# Altium PCB PCB封装.PcbDoc
Units mil, origin at the board's own origin, x right, y up, seen from the top; angles counter-clockwise.
Board outline 4400 x 3100 mil, 2 copper layers (Top Layer, Bottom Layer); 101 components, 123 nets, 502 pads, 7 vias.
Unrouted connection lines stored in the file: 33.
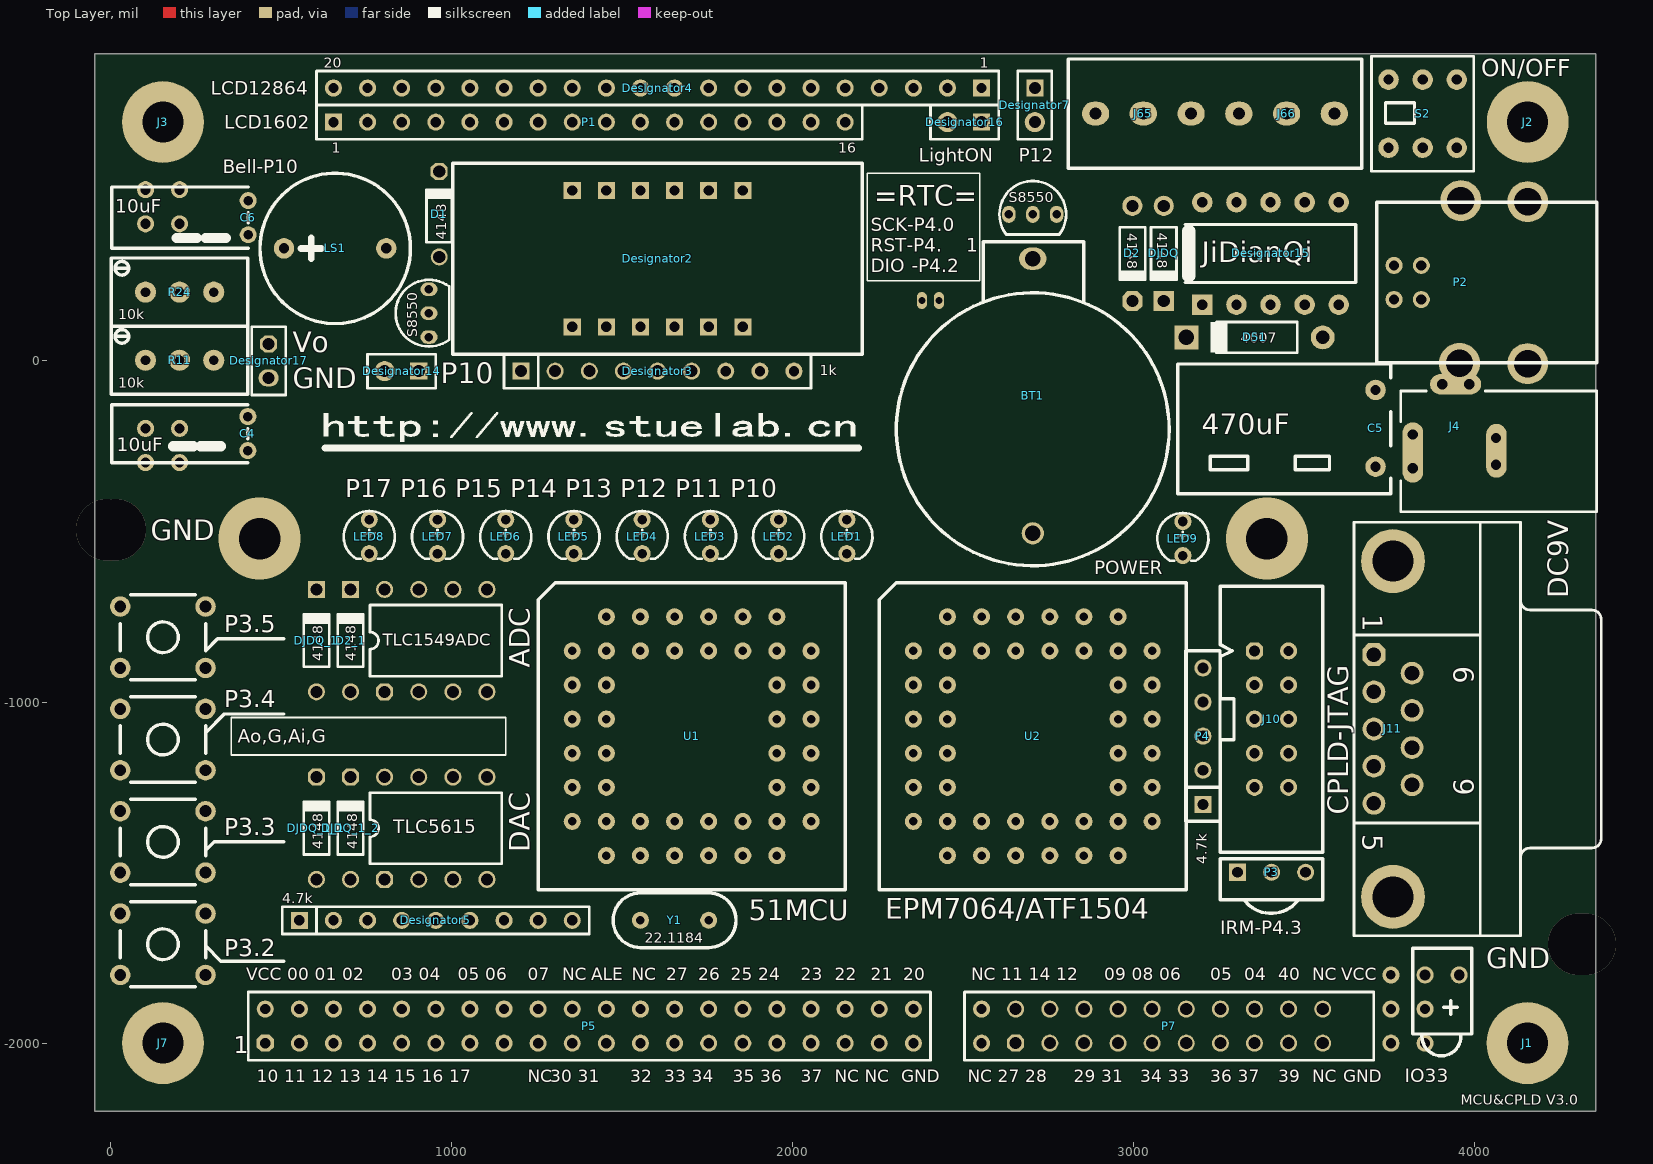
[diagram p0: Top Layer view]
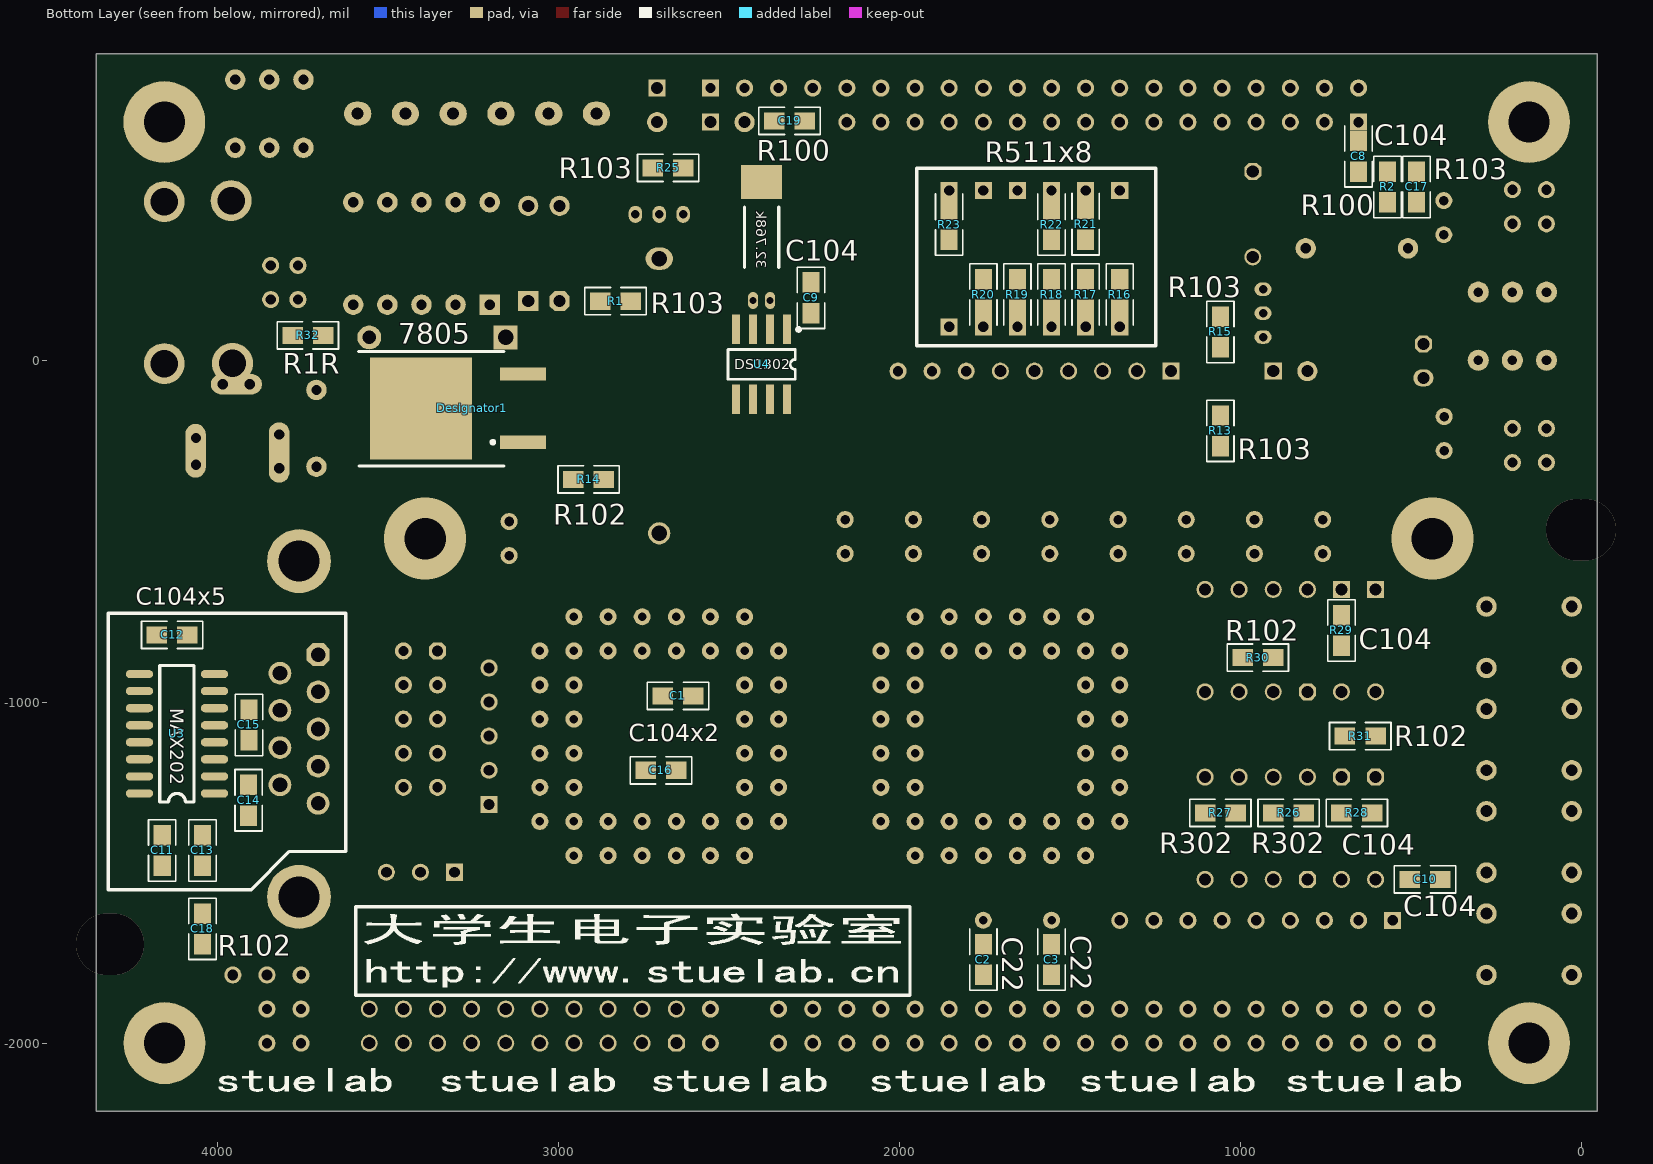
[diagram p1: Bottom Layer view, seen from below]

## Layer stack, top to bottom
Top Layer: signal copper 1.4
Dielectric: dielectric 12.6, FR-4, Dk 4.8
Bottom Layer: signal copper 1.4

## Board outline
-45,900 -45,-2200 4355,-2200 4355,900

## Design rules (kind name [scope] priority, off if disabled: settings)
Clearance [All] p1: gap=15
ComponentClearance [All] p1: gap=10 collisioncheckmode=3 verticalgap=10
FanoutControl Fanout_LCC [All] p1 off: bgadir=Out bgaviamode=Centered fanoutstyle=Auto fanoutdirection=Alternating viagrid=1 // Protel DXP Scope 1 Expression Was: IsLCC   Fanout_LCC (Default Rule)
FanoutControl Fanout_BGA [All] p2 off: bgadir=Out bgaviamode=Centered fanoutstyle=Auto fanoutdirection=Alternating viagrid=1 // Protel DXP Scope 1 Expression Was: IsBGA   Fanout_BGA (Default Rule)
FanoutControl Fanout_SOIC [All] p3 off: bgadir=Out bgaviamode=Centered fanoutstyle=Auto fanoutdirection=Alternating viagrid=1 // Protel DXP Scope 1 Expression Was: IsSOIC   Fanout_SOIC (Default Rule)
FanoutControl Fanout_Default [All] p4: bgadir=Out bgaviamode=Centered fanoutstyle=Auto fanoutdirection=Alternating viagrid=1 // Fanout_Default (Default Rule)
FanoutControl Fanout_Small [All] p5 off: bgadir=Out bgaviamode=Centered fanoutstyle=Auto fanoutdirection=Alternating viagrid=1 // Protel DXP Scope 1 Expression Was: (CompPinCount < 5)   Fanout_Small (Default Rule)
PlaneClearance [All] p1: clearance=50
PlaneConnect [All] p1: planeconnectstyle=Relief reliefexpansion=30 reliefentries=4 reliefconductorwidth=10 reliefairgap=30
PolygonConnect [All] p1: connectstyle=Relief reliefconductorwidth=15 reliefentries=4 polygonreliefangle="90 Angle"
RoutingVias [All] p1: holewidth=20 width=30 viastyle="Through Hole" minholewidth=20 minwidth=30 maxholewidth=20 maxwidth=30
SolderMaskExpansion [All] p1: expansion=4
TestPointUsage [All] p1: valid=0 allowmultiple=FALSE
Testpoint [All] p1: side=15 testpointundercomponent=TRUE minsize=40 maxsize=100 preferedsize=60 minholesize=0 maxholesize=40 preferedholesize=32 testpointgrid=1 style=1023 order=0-112345678
Width [InNet('JDQOUT1')] p1: maxlimit=30 minlimit=10 preferedwidth=30
Width Width_1 [InNet('JDQOUT2')] p2: maxlimit=30 minlimit=10 preferedwidth=30
Width Width_2 [InNet('JDQOUT3')] p3: maxlimit=30 minlimit=10 preferedwidth=30
Width WidthVCC [InNet('VCC')] p4: maxlimit=80 minlimit=10 preferedwidth=30 bottomlayer_prefwidth=40 minimp=50.000000 maximp=50.000000 favimp=50.000000
Width WidthVCCIN [InNet('VCCIN')] p5: maxlimit=80 minlimit=10 preferedwidth=50 toplayer_prefwidth=60 minimp=50.000000 maximp=50.000000 favimp=50.000000
Width WidthVCC9 [InNet('VCC9')] p6: maxlimit=80 minlimit=10 preferedwidth=40
Width WidthGND [InNet('GND')] p7: maxlimit=100 minlimit=10 preferedwidth=50 toplayer_prefwidth=20 bottomlayer_prefwidth=30 minimp=50.000000 maximp=50.000000 favimp=50.000000
Width WidthALL [All] p8: maxlimit=20 minlimit=10 preferedwidth=10
11 further rules are at their usual default settings.

## Classes and differential pairs
component class POWER: C1 C5 C6 C7 C8 C9 C10 C16 D3 J4 LED9 P2 R14 S1 U5
component class RS232: C6 C8 C9 C11 C13 J11 U3 XS1
component class MCU-CPLD: 32.768k BT1 C2 C3 C4 D1 D2 ET0 INT1 J1 J2 J3 J5 J6 J7 J8 J9 J10 LS1 P3 P3.4 P3.5 P4 P5 P6 P7 R1 R2 R13 R15 S8550 U1 U2 U4 Y1
component class DISPLED: DISP1 DISP2 LED1 LED2 LED3 LED4 LED5 LED6 LED7 LED8 P1 R3 R4 R5 R6 R7 R8 R9 R10 R11 R12

## Components (designator, comment, footprint, x,y, rotation, side; value= is the part's Value field where it differs from the comment)
32.768k "XTAL" BCY-W2/D3.1 2355,175 r90 bottom locked
BT1 "Battery" LI1220B 2705,299.72 r0 top locked
C1 "104" 0805 2650,-982 r180 bottom
C2 "C22" 0805 1755,-1755 r90 bottom
C3 "C22" 0805 1555,-1755 r90 bottom
C4 "10uF" CAP1.0D 404,-163 r0 top locked
C5 "470uF" CAP2.0D 3730,-99 r270 top locked
C6 "10uF" CAP1.0D 405,470 r0 top locked
C8 "C104" 0805 655,599.72 r90 bottom
C9 "C104" 0805 2260,185 r90 bottom
C10 "C104" 0805 460,-1520 r180 bottom
C11 "C104" 0805 4162,-1435 r90 bottom
C12 "C104" 0805 4133,-803 r180 bottom
C13 "C104x5" 0805 4044,-1435 r90 bottom
C14 "C104" 0805 3908.8,-1287.94 r90 bottom
C15 "C104" 0805 3907.72,-1067 r90 bottom
C16 "C104x2" 0805 2700,-1200 r0 bottom
C17 "R103" 0805 485,510 r270 bottom locked
C18 "R102" 0805 4044,-1665 r90 bottom locked
C19 "R100" 0805 2323,704 r180 bottom
D1 "4148" DIO7.1-3.9x1.9#1 965,425 r90 top locked
D2 "4148" DIO7.1-3.9x1.9#2 2997,315 r270 top
D2_1 "4148" DIO7.1-3.9x1.9#3 705,-820 r90 top locked
D51 "4007" DIO7.1-3.9x1.9#4 3295,69 r180 top locked
Designator1 "7805" TO-263 3309.91,-138.28 r90 bottom locked
Designator2 "Comment" DISP4 1355,100 r0 top locked
Designator3 "1k" HDR1X9#1 1205,-30 r0 top locked
Designator4 "Comment" HDR1X20 2555,800 r180 top locked
Designator5 "4.7k" HDR1X9#2 555,-1640 r0 top locked
Designator7 "Comment" HDR1X2#1 2711,800 r270 top
Designator14 "Comment" HDR1X2#1 905,-30 r180 top locked
Designator15 "JiDianQi" DIP10 3202,165 r90 top locked
Designator16 "Comment" HDR1X2#1 2555,700 r180 top
Designator17 "Comment" HDR1X2#2 465,50 r270 top locked
DJDQ "4148" DIO7.1-3.9x1.9#5 3089,315 r270 top
DJDQ_1 "4148" DIO7.1-3.9x1.9#3 605,-820 r90 top locked
DJDQ_1_1 "4148" DIO7.1-3.9x1.9#6 605,-1370 r90 top locked
DJDQ_1_2 "4148" DIO7.1-3.9x1.9#6 705,-1370 r90 top locked
J1 "Socket" HANPAN2 4155,-2000 r0 top
J2 "Socket" HANPAN2 4155.91,700 r0 top
J3 "Socket" HANPAN2 155,700 r0 top
J4 "PWR2.5" KLD-0202 3819,-216 r180 top locked
J7 "Socket" HANPAN2 155,-2000 r0 top locked
J10 "CPLD-JTAG" CON10 3355,-850 r270 top locked
J11 "D Connector 9" DSUB1.385-2H9 4135,-1079 r270 top locked
J65 "CON3" CON3BIG 2889,725 r0 top locked
J66 "CON3" CON3BIG 3309,725 r0 top locked
LED1 "P10" LED0.3 2160,-465 r270 top locked
LED2 "P10" LED0.3 1960,-465 r270 top locked
LED3 "P10" LED0.3 1760,-465 r270 top locked
LED4 "P10" LED0.3 1560,-465 r270 top locked
LED5 "P10" LED0.3 1360,-465 r270 top locked
LED6 "P10" LED0.3 1160,-465 r270 top locked
LED7 "P10" LED0.3 960,-465 r270 top locked
LED8 "P10" LED0.3 760,-465 r270 top locked
LED9 "POWER" LED0.3 3145,-470.75 r270 top locked
LS1 "Bell-P10" BELL 810,330 r0 top locked
P1 "Header 16" LCD1602B 655,700 r0 top locked
P2 "USBCON" USBCON 3960,230 r180 top locked
P3 "IRM-P4.3" HWJS 3305,-1499 r0 top locked
P3.2 "SW-PB" SW6X6 155,-1710 r0 top locked
P3.3 "SW-PB" SW6X6 155,-1410 r0 top locked
P3.4 "SW-PB" SW6X6 155,-1110 r0 top locked
P3.5 "SW-PB" SW6X6 155,-810 r0 top locked
P4 "4.7k" SIP5 3204,-1300 r90 top
P5 "Header 20X2" HDR2X20 455,-2000 r0 top locked
P7 "Header 9X2" HDR2X9 2655,-2000 r0 top locked
R1 "R103" 0805 2833,175 r0 bottom
R2 "R100" 0805 570,510 r90 bottom locked
R11 "10k" VRX 104,2 r0 top locked
R13 "R103" CR2012-0805 1060,-205 r270 bottom locked
R14 "R102" CR2012-0805 2912,-347 r180 bottom
R15 "R103" 0805 1060,85 r90 bottom locked
R16 "R511x8" CR2012-0805 1355,194.72 r270 bottom locked
R17 "511" CR2012-0805 1455,194.72 r270 bottom locked
R18 "511" CR2012-0805 1555,194.72 r270 bottom locked
R19 "511" CR2012-0805 1655,194.72 r270 bottom locked
R20 "511" CR2012-0805 1755,194.72 r270 bottom locked
R21 "511" CR2012-0805 1455,400.72 r270 bottom locked
R22 "511" CR2012-0805 1555,399.72 r270 bottom locked
R23 "511" CR2012-0805 1855,399.72 r270 bottom locked
R24 "10k" VRX 104,201.72 r0 top locked
R25 "R103" 0805 2679,566 r180 bottom locked
R26 "R302" CR2012-0805 860,-1325 r0 bottom locked
R27 "R302" CR2012-0805 1060,-1325 r0 bottom locked
R28 "C104" CR2012-0805 660,-1325 r180 bottom locked
R29 "C104" CR2012-0805 705,-790 r270 bottom
R30 "R102" CR2012-0805 950,-870 r0 bottom
R31 "R102" CR2012-0805 650,-1100 r0 bottom
R32 "R1R" CR2012-0805 3735,75 r180 bottom
S2 "SW-DPDT" DPDT-6 3848,724.72 r90 top locked
S8550 "2N3906" BCY-W3/E4 935,140 r0 top locked
S8550 "2N3906" BCY-W3/E4 2705,429.72 r270 top locked
TLC1549ADC "Comment" PDIP8 955,-820 r0 top locked
TLC5615 "Comment" PDIP8 955,-1370 r0 top locked
U1 "STC89C5X" PGA44 1355,-750 r0 top locked
U2 "EPM7064SLC44-10" PGA44 2355,-750 r0 top locked
U3 "MAX202" SO-16 4008.8,-1267.94 r0 bottom locked
U4 "DS1302" SO-8 2405,-10 r0 bottom locked
Y1 "22.1184" CY 1755,-1640 r180 top locked
? "Comment" LED-1 3905,-1800 r270 top locked

## Footprints (in the part's own frame and the unit in brackets; to place one, negate y for a bottom-side part, rotate by r counter-clockwise, add the part's x,y. Pads: shape width x height; smd on the part's side, far side on the other; paste and mask are expansions set on the pad)
0805 [mil]
  rect 60x50 smd: 1(-45,0) 2(45,0)
  silkscreen extent -90,-40 90,40
BCY-W2/D3.1 [mil]
  rect 100x120 smd: 0(350,50)
  oval 50x30 hole 20: 1(2,75) 2(2,25)
  silkscreen extent 100,0 275,100
BCY-W3/E4 [mil]
  oval 50x39.37 hole 25: 1(0,-70) 2(0,0)
  oval 50x40 hole 25: 3(0,70)
  silkscreen extent -98,-98 59,98
BELL [mil]
  round 60 hole 30: 1(0,0) 2(-300,0)
  silkscreen extent -370,-220 70,220
CAP1.0D [mil]
  round 50 hole 28: 1(0,0) 2(0,-100)
  silkscreen extent -399,-135 0,35
CAP2.0D [mil]
  round 60 hole 30: 1(-14,-20) 2(211,-20)
  silkscreen extent -90,-600 290,25
CON3BIG [mil]
  oval 80x70 hole 35: 1(0,0) 2(140,0) 3(280,0)
  silkscreen extent -80,-160 360,160
CON10 [mil]
  oct 50x50 hole 32: 1(0,0)
  round 50 hole 30: 2(0,100) 3(100,0) 4(100,100) 5(200,0) 6(200,100) 7(300,0) 8(300,100) 9(400,0) 10(400,100)
  silkscreen extent -190,-100 590,200
CR2012-0805 [mil]
  rect 60x50 smd: 1(-45,0) 2(45,0)
  silkscreen extent -90,-40 90,40
CY [mil]
  round 50 hole 25: 1(0,-0.28) 2(200,-0.28)
  silkscreen extent -80,-80 280,80
DIO7.1-3.9x1.9#1 [mil]
  round 50 hole 35.43: 1(-120,0)
  oct 50x50 hole 35.43: 2(130,0)
  silkscreen extent -77,-37 81,37
DIO7.1-3.9x1.9#2 [mil]
  round 59.06 hole 35.43: 1(-139.76,0)
  oct 59.05x59.05 hole 35.43: 2(139.76,0)
  silkscreen extent -77,-37 81,37
DIO7.1-3.9x1.9#3 [mil]
  round 50 hole 35.43: 1(-150,0)
  rect 50x50 hole 35.43: 2(150,0)
  silkscreen extent -77,-37 81,37
DIO7.1-3.9x1.9#4 [mil]
  round 70 hole 40: 1(-260,0)
  rect 70x70 hole 45: 2(139.76,0)
  silkscreen extent -185,-45 69,45
DIO7.1-3.9x1.9#5 [mil]
  round 59.05 hole 35.43: 1(-139.76,0)
  rect 59.05x59.05 hole 35.43: 2(139.76,0)
  silkscreen extent -77,-37 81,37
DIO7.1-3.9x1.9#6 [mil]
  round 50 hole 35.43: 1(-150,0)
  oct 50x50 hole 35.43: 2(150,0)
  silkscreen extent -77,-37 81,37
DIP10 [mil]
  rect 60x60 hole 30: 1(0,0)
  round 60 hole 30: 2(0,-100) 3(0,-200) 4(0,-300) 5(0,-400) 6(300,-400) 7(300,-300) 8(300,-200) 9(300,-100) 10(300,0)
  silkscreen extent 65,-450 235,50
DISP4 [mil]
  rect 50x50 hole 30: 1(0,0) 2(100,0) 3(200,0) 4(300,0) 5(400,0) 6(500,0) 7(500,400) 8(400,400) 9(300,400) 10(200,400) 11(100,400) 12(0,400)
  silkscreen extent -350,-80 850,480
DPDT-6 [mil]
  round 60 hole 30: 1(-100,100) 2(-100,0) 3(-100,-100) 4(100,-100) 5(100,0) 6(100,100)
  silkscreen extent -169,-150 169,150
DSUB1.385-2H9 [mm]
  oct 1.69x1.69 hole 1.09: 1(-5.54,-10.92)
  round 1.69 hole 1.09: 2(-2.77,-10.92) 3(0,-10.92) 4(2.77,-10.92) 5(5.54,-10.92) 6(-4.155,-8.08) 7(-1.385,-8.08) 8(1.385,-8.08) 9(4.155,-8.08)
  round 4.76 hole 3.048: 10(-12.495,-9.5) 11(12.495,-9.5)
  silkscreen extent -15.4,-12.4 15.4,6
HANPAN2 [mil]
  round 240 hole 120: 1(0,0)
HDR1X2#1 [mm]
  rect 1.27x1.27 hole 0.9: 1(0,0)
  round 1.5 hole 0.9: 2(2.54,0)
  silkscreen extent -1.27,-1.27 3.81,1.27
HDR1X2#2 [mm]
  oct 1.27x1.27 hole 0.9: 1(0,0)
  oval 1.27x1.5 hole 0.9: 2(2.54,0)
  silkscreen extent -1.27,-1.27 3.81,1.27
HDR1X9#1 [mm]
  rect 1.27x1.27 hole 0.9: 1(0,0)
  round 1.27 hole 0.9: 2(2.54,0) 3(5.08,0) 4(7.62,0) 5(10.16,0) 6(12.7,0)
  round 1.27 hole 0.762: 7(15.24,0) 8(17.78,0) 9(20.32,0)
  silkscreen extent -1.27,-1.27 21.59,1.27
HDR1X9#2 [mm]
  rect 1.27x1.27 hole 0.762: 1(0,0)
  round 1.27 hole 0.762: 2(2.54,0) 3(5.08,0) 4(7.62,0) 5(10.16,0) 6(12.7,0) 7(15.24,0) 8(17.78,0) 9(20.32,0)
  silkscreen extent -1.27,-1.02 21.59,1.02
HDR1X20 [mil]
  rect 50x50 hole 30: 1(0,0)
  round 50 hole 30: 2(100,0) 3(200,0) 4(300,0) 5(400,0) 6(500,0) 7(600,0) 8(700,0) 9(800,0) 10(900,0) 11(1000,0) 12(1100,0) 13(1200,0) 14(1300,0) 15(1400,0) 16(1500,0) 17(1600,0) 18(1700,0) 19(1800,0) 20(1900,0)
  silkscreen extent -50,-50 1950,50
HDR2X9 [mm]
  oct 1.27x1.27 hole 0.9: 1(0,0)
  round 1.27 hole 0.9: 2(0,2.54) 3(2.54,0) 4(2.54,2.54) 5(5.08,0) 6(5.08,2.54) 7(7.62,0) 8(7.62,2.54) 9(10.16,0) 10(10.16,2.54) 11(12.7,0) 12(12.7,2.54) 13(15.24,0) 14(15.24,2.54) 15(17.78,0) 16(17.78,2.54) 17(20.32,0) 18(20.32,2.54) 19(22.86,0) 20(22.86,2.54)
  silkscreen extent -3.81,-1.27 26.67,3.81
HDR2X20 [mil]
  oct 50x50 hole 30: 1(0,0)
  round 50 hole 30: 2(0,100) 3(100,0) 4(100,100) 5(200,0) 6(200,100) 7(300,0) 8(300,100) 9(400,0) 10(400,100) 11(500,0) 12(500,100) 13(600,0) 14(600,100) 15(700,0) 16(700,100) 17(800,0) 18(800,100) 19(900,0) 20(900,100) 21(1000,0) 22(1000,100) 23(1100,0) 24(1100,100) 25(1200,0) 26(1200,100) 27(1300,0) 28(1300,100) 29(1400,0) 30(1400,100) 31(1500,0) 32(1500,100) 33(1600,0) 34(1600,100) 35(1700,0) 36(1700,100) 37(1800,0) 38(1800,100) 39(1900,0) 40(1900,100)
  silkscreen extent -50,-50 1950,150
HWJS [mil]
  rect 50x50 hole 32: 1(0,0)
  round 50 hole 32: 2(100,0) 3(200,0)
  silkscreen extent -50,-121 250,40
KLD-0202 [mm]
  oval 1.524x4.5 all layers, no hole: 1(-0.009,1.33)
  round 1.5 hole 0.762: 1A(0,0) 1B(0,2.5) 2A(-6.2,0.25) 2B(-6.2,2.25)
  oval 1.524x4 all layers, no hole: 2(-6.232,1.203)
  oval 3.81x1.524 all layers, no hole: 3(-3.184,-3.75)
  round 1.524 hole 0.762: 3A(-4.2,-3.75) 3B(-2.2,-3.75)
  silkscreen extent -13.7,-3.25 0.9,5.75
LCD1602B [mil]
  rect 50x50 hole 30: 1(0,0)
  round 50 hole 30: 2(100,0) 3(200,0) 4(300,0) 5(400,0) 6(500,0) 7(600,0) 8(700,0) 9(800,0) 10(900,0) 11(1000,0) 12(1100,0) 13(1200,0) 14(1300,0) 15(1400,0) 16(1500,0)
  silkscreen extent -50,-50 1550,50
LED0.3 [mil]
  round 50 hole 28: 1(0,0) 2(100,0)
  silkscreen extent -25,-75 115,75
LED-1 [mm] "Typical RED GaAs LED; 2 Leads"
  round 1.27 hole 0.8: 1(0,1.27) 2(0,-1.27)
  silkscreen extent -2,-2.2 6.02,2.2
LI1220B [mil]
  oval 80x65 hole 45: 1(0,0)
  round 65 hole 45: 2(0,-805)
  silkscreen extent -400,-900 400,50
PDIP8 [mm] "8-Pin Plastic Dual In-Line Package (PDIP)"
  oct 1.27x1.27 hole 0.9: 1(-3.81,-3.81)
  round 1.27 hole 0.9: 2(-1.27,-3.81) 3(1.27,-3.81) 4(3.81,-3.81) 5(3.81,3.81) 6(1.27,3.81) 7(-1.27,3.81) 8(-3.81,3.81)
  silkscreen extent -4.9,-2.65 4.9,2.65
PGA44 [mil]
  round 50 hole 25: 1(400,-100) 2(300,0) 3(300,-100) 4(200,0) 5(200,-100) 6(100,0) 7(0,-100) 8(100,-100) 9(0,-200) 10(100,-200) 11(0,-300) 12(100,-300) 13(0,-400) 14(100,-400) 15(0,-500) 16(100,-500) 17(0,-600) 18(100,-700) 19(100,-600) 20(200,-700) 21(200,-600) 22(300,-700) 23(300,-600) 24(400,-700) 25(400,-600) 26(500,-700) 27(500,-600) 28(600,-700) 29(700,-600) 30(600,-600) 31(700,-500) 32(600,-500) 33(700,-400) 34(600,-400) 35(700,-300) 36(600,-300) 37(700,-200) 38(600,-200) 39(700,-100) 40(600,0) 41(600,-100) 42(500,0) 43(500,-100) 44(400,0)
  silkscreen extent -100,-800 800,100
SIP5 [mil]
  rect 50x50 hole 32: 1(0,0)
  round 50 hole 32: 2(100,0) 3(200,0) 4(300,0) 5(400,0)
  silkscreen extent -50,-50 450,50
SO-8 [mm]
  rect 0.6x2.2 smd: 1(-1.905,-2.6) 2(-0.635,-2.6) 3(0.635,-2.6) 4(1.905,-2.6) 5(1.905,2.6) 6(0.635,2.6) 7(-0.635,2.6) 8(-1.905,2.6)
  silkscreen extent -2.88,-2.72 2.5,1.1
SO-16 [mil]
  oval 80x24 smd: 1(0,0) 2(0,-50) 3(0,-100) 4(0,-150) 5(0,-200) 6(0,-250) 7(0,-300) 8(0,-350) 9(220,-350) 10(220,-300) 11(220,-250) 12(220,-200) 13(220,-150) 14(220,-100) 15(220,-50) 16(220,0)
  silkscreen extent 60,-375 160,25
SW6X6 [mil]
  round 60 hole 35: 1(-125,90) 2(-125,-90) 3(125,90) 4(125,-90)
  silkscreen extent -125,-125 125,125
TO-263 [mm]
  rect 1x3.4 smd: 1(-2.54,-5.225) 3(2.54,-5.225)
  rect 7.62x7.62 smd: 4(-0.025,2.37)
  silkscreen extent -4.32,-3.81 4.22,7.03
USBCON [mil]
  round 50 hole 30: 1(196,-50) 2(196,50) 3(116,50) 4(116,-50)
  round 120 hole 80: 5(4,237) 6(0,-240) 7(-196,-237) 8(-196,238)
  silkscreen extent -399,-235 246,235
VRX [mil]
  round 62 hole 28: 1(0,0) 2(200,0) 3(100,0)
  silkscreen extent -100,-100 300,100

## Part data
?: library part LED1

## Free pads (board coordinates)
  round 50 hole 30: 0(2555,-1900) 0(3755,-1900) 1(2555,-2000) 1(3755,-2000) 2(3855,-1900) 3(3855,-2000) 6(104,502) 7(104,402) 8(204,502) 9(204,402) 10(104,-198) 11(104,-298) 12(204,-198) 13(204,-298)

## Via types
v1: diameter 180, hole 180, Top Layer to Bottom Layer, 4 vias
v2: diameter 240, hole 122.05, Top Layer to Bottom Layer, 2 vias
v3: diameter 50, hole 28, Top Layer to Bottom Layer, 1 vias

## Nets (pads, with @x,y where several pads share a name; then routed paths per layer and width w, separated by ;. In a path a pad name is that pad's centre, name@x,y a point inside that pad or via, vN(x,y) a via of type N, cw(c..) or ccw(c..) an arc to the next point about the centre after c; other vN are vias at no path point)
7SEG1: Designator2.6 P7.13 U2.36
7SEG2: Designator2.8 P7.15 U2.37
7SEG3: Designator2.9 P7.17 U2.39
7SEG4: Designator2.12 P7.18 U2.40
a: Designator2.11 R21.1
aa: P7.4 R21.2 U2.14
ALE: P5.22 U1.33 U2.43
ALin: D2_1.1 DJDQ_1_2.2 R30.1 TLC1549ADC.2
Alin0: R30.2
b: Designator2.7 R23.1
bb: P7.16 R23.2 U2.4
bellin: Designator14.2 R15.1
c: Designator2.4 R19.2
cc: P7.12 R19.1 U2.6
d: Designator2.2 R17.2
DAO: DJDQ_1.1 DJDQ_1_1.2 R31.1 TLC5615.7
DAO0: R31.2
DAREF: R26.2 R27.1 TLC5615.6
dd: P7.8 R17.1 U2.9
e: Designator2.1 R16.2
ee: P7.6 R16.1 U2.12
f: Designator2.10 R22.1
ff: P7.2 R22.2 U2.11
g: Designator2.5 R20.2
gg: P7.14 R20.1 U2.5
GND: 32.768k.0 BT1.2 C1.2 C2.1 C3.1 C5.2 C6.2 C8.2 C9.2 C10.2 C11.2 C12.1 C16.2 D51.1 Designator1.4 Designator4.1 Designator4.20 Designator17.2 DJDQ_1_1.1 DJDQ_1_2.1 J4.2 J4.2A J4.2B J4.3 J4.3A J4.3B J10.2 J10.10 J11.5 J11.10 J11.11 LED9.2 P1.1 P1.16 P2.4 P2.5 P2.6 P2.7 P2.8 P3.2 P3.2.1 P3.2.3 P3.3.1 P3.3.3 P3.4.1 P3.4.3 P3.5.1 P3.5.3 P5.39 R11.1 R13.2 R24.1 R27.2 R28.2 R29.2 S8550.3 TLC1549ADC.3 TLC1549ADC.4 TLC5615.5 U1.22 U2.10 U2.22 U2.30 U2.42 U3.11 U3.13 U3.15 U4.4
IO01: P7.1 U2.27
IO02: P7.3 U2.28
IO03: P7.5 U2.29
IO04: P7.7 U2.31
IO05: P7.9 U2.34
IO06: ?.2 P7.11 U2.33
JDQC1: Designator7.1 R25.2
JDQCP: Designator15.10 DJDQ.1 S8550.1@2635,429.72
JDQCP1: R25.1 S8550.2@2705,429.72
JDQOUT1: Designator15.2 J65.1
JDQOUT2: Designator15.3 J65.2
JDQOUT3: Designator15.4 J65.3
JDQOUT21: Designator15.9 J66.1
JDQOUT22: Designator15.8 J66.2
JDQOUT23: Designator15.7 J66.3
LCDEN: Designator4.6 U2.41
LcdEn2: P1.6 U2.16
LCDRST: C6.1 C17.2 Designator4.17
LCDVEE: Designator4.18 R24.2
LCDVIN: Designator4.3 R24.3
LEDD0: Designator3.9 LED1.1
LEDD1: Designator3.8 LED2.1
LEDD2: Designator3.7 LED3.1
LEDD3: Designator3.6 LED4.1
LEDD4: Designator3.5 LED5.1
LEDD5: Designator3.4 LED6.1
LEDD6: Designator3.3 LED7.1
LEDD7: Designator3.2 LED8.1
ledf0: ?.1 C18.1
NetBT1_1: BT1.1 R1.1 U4.8
NetC12_2: C12.2 U3.6
NetC13_2: C13.2 U3.2
NetC14_1: C14.1 U3.1
NetC14_2: C14.2 U3.3
NetC15_1: C15.1 U3.4
NetC15_2: C15.2 U3.5
NetD1_1: D1.1 LS1.1 S8550.1@935,70
NetD1_2: D1.2 LS1.2 R2.1
NetD2_2: D2.2 R1.2
NetJ10_1: J10.1 P4.5 U2.32
NetJ10_3: J10.3 P4.4 U2.38
NetJ10_7: J10.5 P4.3 U2.13
NetJ10_9: J10.9 P4.2 U2.7
NetLED9_1: LED9.1 R14.1
NetP1_3: Designator17.1 P1.3 R11.3
NetQ1_2: R15.2 S8550.2@935,140
NetU4_2: 32.768k.2 U4.2
NetU4_3: 32.768k.1 U4.3
p: Designator2.3 R18.2
P00: Designator4.7 Designator5.2 P1.7 P5.4 U1.43 U2.17
P01: Designator4.8 Designator5.3 P1.8 P5.6 U1.42 U2.18
P02: Designator4.9 Designator5.4 P1.9 P5.8 U1.41 U2.19
P03: Designator4.10 Designator5.5 P1.10 P5.10 U1.40 U2.20
P04: Designator4.11 Designator5.6 P1.11 P5.12 U1.39 U2.21
P05: Designator4.12 Designator5.7 P1.12 P5.14 U1.38 U2.24
P06: Designator4.13 Designator5.8 P1.13 P5.16 U1.37 U2.25
P07: Designator4.14 Designator5.9 P1.14 P5.18 U1.36 U2.26
P10: Designator14.1 LED1.2 P5.1 U1.2
P11: LED2.2 P5.3 TLC5615.1 U1.3
P12: Designator7.2 LED3.2 P5.5 TLC5615.2 U1.4
P13: LED4.2 P5.7 TLC5615.4 U1.5
P14: LED5.2 P5.9 TLC5615.3 U1.6
P15: LED6.2 P5.11 TLC1549ADC.5 U1.7
P16: LED7.2 P5.13 TLC1549ADC.6 U1.8
P17: LED8.2 P5.15 TLC1549ADC.7 U1.9
P20: Designator4.4 P1.4 P5.40 U1.24
P21: Designator4.5 P1.5 P5.38 U1.25
P22: Designator4.15 P5.36 U1.26
P23: Designator4.16 P5.34 U1.27
P24: P5.32 U1.28
P25: P5.30 U1.29
P26: P5.28 U1.30
P27: P5.26 U1.31 U2.1
P30: P5.19 U1.11 U3.9
P31: P5.21 U1.13 U3.10
P32: P3.2.2 P3.2.4 P5.23 U1.14
P33: P3.3.2 P3.3.4 P5.25 U1.15
P34: P3.4.2 P3.4.4 P5.27 U1.16
P35: P3.5.2 P3.5.4 P5.29 U1.17
P36: P5.31 U1.18 U2.2
P37: P5.33 U1.19 U2.44
P40: U1.23 U4.7
P41: U1.34 U4.5
P42: U1.1 U4.6
P43: P3.1 U1.12
pp: P7.10 R18.1 U2.8
RSET: C4.2 R13.1 U1.10
RXD': J11.2 U3.7
TXD': J11.3 U3.8
VCC: C1.1 C4.1 C8.1 C9.1 C10.1 C11.1 C13.1 C16.1 C17.1 C18.2 D2.1 D2_1.2 Designator3.1 Designator4.2 Designator5.1 Designator15.1 Designator16.1 DJDQ.2 DJDQ_1.2 J10.4 P1.2 P3.3 P4.1 P5.2 R2.2 R11.2 R14.2 R26.1 R28.1 R29.1 S2.1 S2.3 S2.4 S2.6 TLC1549ADC.1 TLC1549ADC.8 TLC5615.8 U1.35 U1.44 U2.3 U2.15 U2.23 U2.35 U3.16 U4.1
VCC9: D51.2 Designator1.1 J4.1 J4.1A J4.1B
VCCIN: C5.1 Designator1.3 R32.1 S2.2 S2.5
VCCL: C19.2 Designator4.19 P1.15
VCCL0: C19.1 Designator16.2
VCCUSB: P2.1 R32.2
XTAL1: C2.2 U1.21 Y1.1
XTAL2: C3.2 U1.20 Y1.2
pads on no net: Designator15.5 Designator15.6 J1.1 J2.1 J3.1 J7.1 J10.6 J10.7 J10.8 J11.1 J11.4 J11.6 J11.7 J11.8 J11.9 P2.2 P2.3 P5.17 P5.20 P5.24 P5.35 P5.37 P7.19 P7.20 U1.32 U3.12 U3.14
copper on no net:
  other v1: 4305,-1710 4325,-1710 -10,-495 15,-495
  other v2: 438.46,-520.75 3391.22,-520.75
  other v3: 3755,-1800

## Silkscreen, mask and mechanical layers (free items; w line width, h text height)
Top Overlay:
  drawing of 1667 lines, arcs and shapes, not listed
  text "20" at 626,859.72 h30
  text "1" at 2550,860 h30
  text "ON/OFF" at 4020,835 h50
  text "LCD12864" at 295,780 h40
  text "LCD1602" at 335,680 h40
  text "1" at 650,610 h30
  text "16" at 2135,610 h30
  text "LightON" at 2371,584 h40
  text "P12" at 2664,584 h40
  text "Bell-P10" at 330,550 h40
  text "=RTC=" at 2240,455 h60
  text "SCK-P4.0" at 2230,380 h40
  text "RST-P4." at 2230,320 h40
  text "1" at 2510,320 h40
  text "DIO" at 2230,260 h40
  text "-P4.2" at 2350,260 h40
  text "Vo" at 535,25 h60
  text "P10" at 970,-65 h60
  text "GND" at 535,-80 h60
  text "P17 P16 P15 P14 P13 P12 P11 P10" at 690,-400 h53
  text "GND" at 120,-525 h60
  text "DC9V" at 4275,-695 h60 r90
  text "ADC" at 1230,-900 h60 r90
  text "Ao,G,Ai,G" at 375,-1120 h40
  text "DAC" at 1230,-1440 h60 r90
  text "EPM7064/ATF1504" at 2273,-1635.28 h60
  text "51MCU" at 1873,-1640.28 h60
  text "GND" at 4035,-1780 h60
  text "VCC" at 400,-1815 h36
  text "00 01 02" at 520,-1815 h36
  text "03 04" at 825,-1815 h36
  text "05 06" at 1020,-1815 h36
  text "07" at 1225,-1815 h36
  text "NC" at 1325,-1815 h36
  text "ALE" at 1410,-1815 h36
  text "NC" at 1530,-1815 h36
  text "27" at 1630,-1815 h36
  text "26" at 1725,-1815 h36
  text "25 24" at 1820,-1815 h36
  text "23" at 2025,-1815 h36
  text "22" at 2125,-1815 h36
  text "21" at 2230,-1815 h36
  text "20" at 2325,-1815 h36
  text "NC 11 14 12" at 2525,-1815 h36
  text "09 08 06" at 2915,-1815 h36
  text "05" at 3225,-1815 h36
  text "04" at 3325,-1815 h36
  text "40" at 3425,-1815 h36
  text "NC" at 3525,-1815 h36
  text "VCC" at 3610,-1815 h36
  text "10 11 12 13 14 15 16 17" at 430,-2115 h36
  text "NC" at 1225,-2115 h36
  text "30 31" at 1290,-2115 h36
  text "32" at 1525,-2115 h36
  text "33 34" at 1625,-2115 h36
  text "35 36" at 1825,-2115 h36
  text "37" at 2025,-2115 h36
  text "NC NC" at 2125,-2115 h36
  text "GND" at 2320,-2115 h36
  text "NC 27 28" at 2515,-2115 h36
  text "29 31" at 2825,-2115 h36
  text "34 33" at 3020,-2115 h36
  text "36 37" at 3225,-2115 h36
  text "39" at 3425,-2115 h36
  text "NC" at 3525,-2115 h36
  text "GND" at 3615,-2115 h36
  text "IO33" at 3795,-2115 h40
  text "MCU&CPLD V3.0" at 3960,-2180 h30
Bottom Overlay:
  drawing of 6051 lines, arcs and shapes, not listed
Mechanical 1:
  the board outline again, w10

## Text inside footprints (layer, text, board x,y; h text height)
J11: Top Overlay "6" at 3939.13,-895.73 h59.06 r270; Top Overlay "9" at 3939.13,-1222.9 h59.06 r270; Top Overlay "5" at 3673,-1387 h59.06 r270; Top Overlay "1" at 3673,-742 h59.06 r270
P5: Top Overlay "1" at 363,-2030.28 h50